# Altium PCB LED.PcbDoc
Units mm, origin at the board's own origin, x right, y up, seen from the top; angles counter-clockwise.
Board outline 20 x 20 mm, 2 copper layers (Top Layer, Bottom Layer), stack 1.671 mm thick; 5 components, 4 nets, 10 pads, 1 vias.
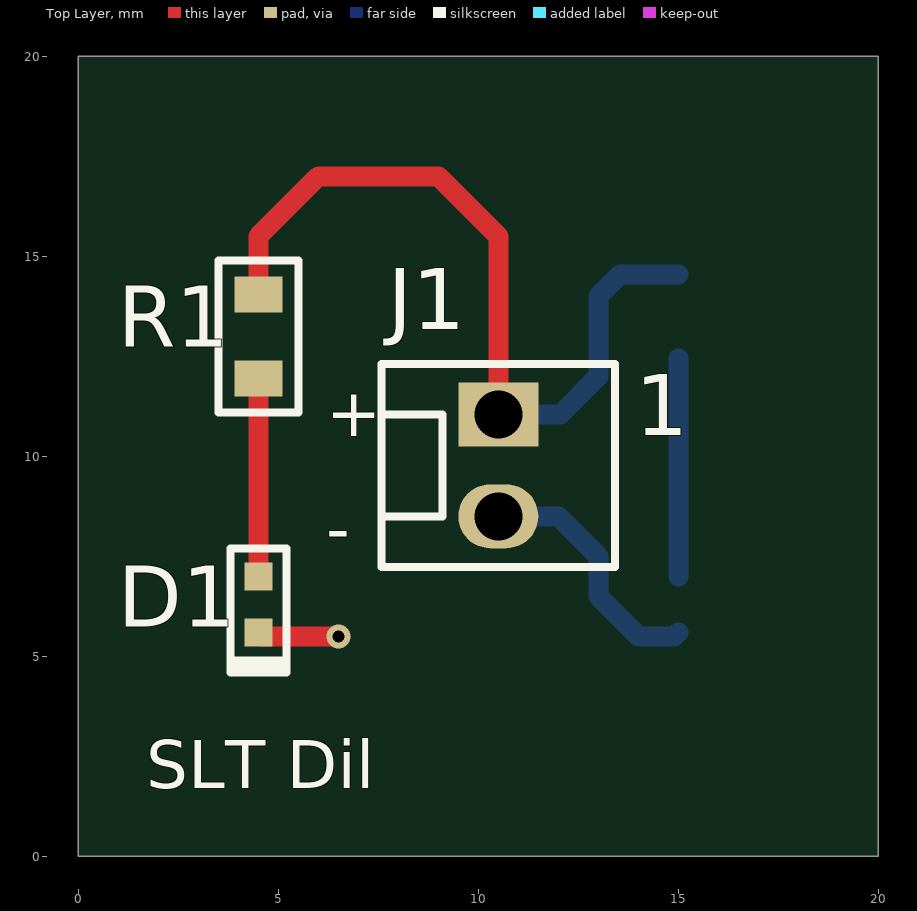
[diagram p0: Top Layer view]
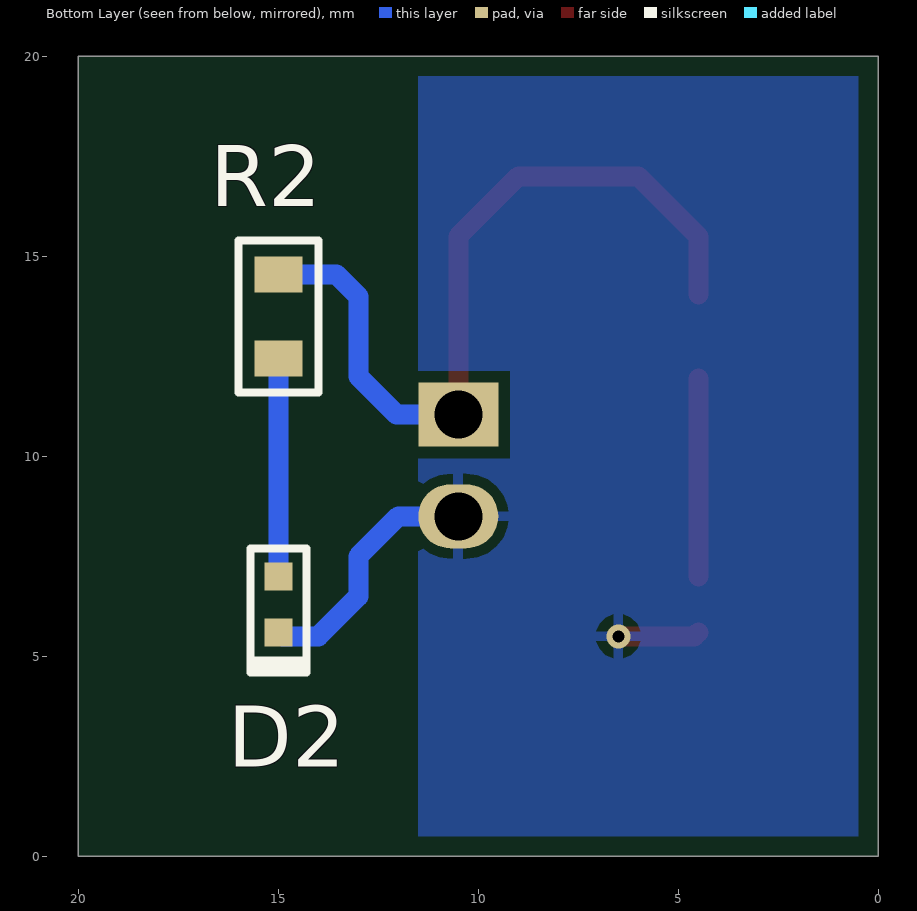
[diagram p1: Bottom Layer view, seen from below]
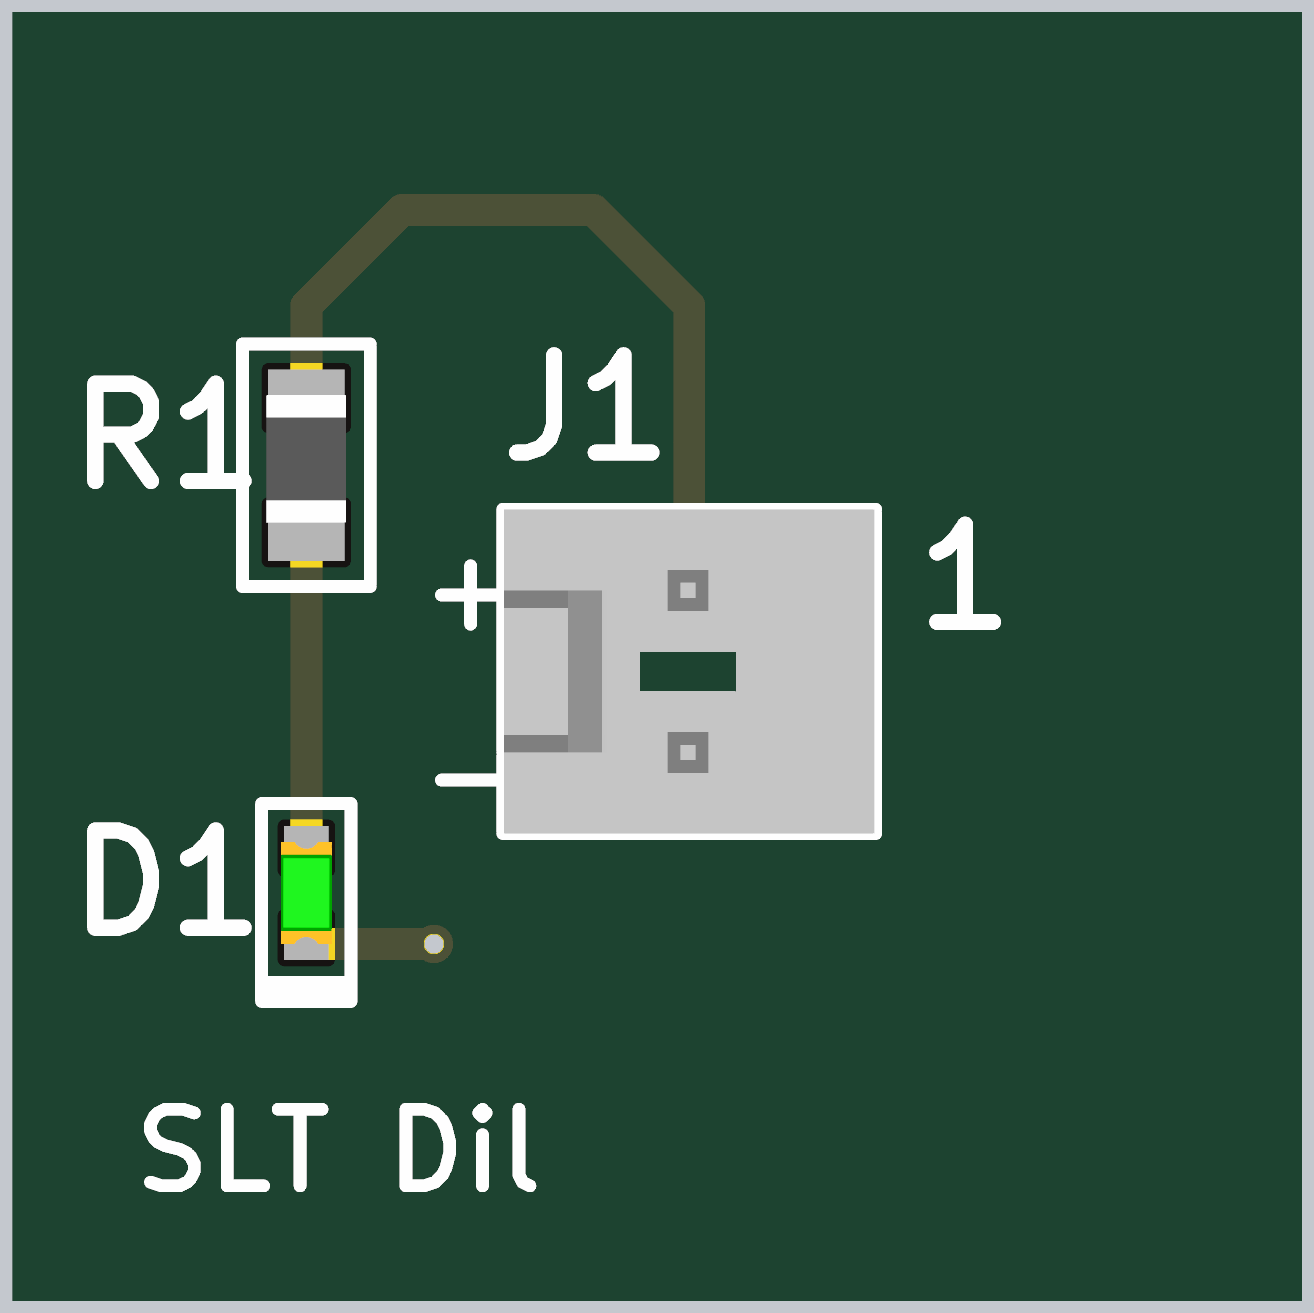
[diagram p2: 3D render of the assembled board from above, using the file's embedded part models]

## Layer stack, top to bottom
Top Solder: solder mask 0.0102, Solder Resist, Dk 3.5
Top Layer: signal copper 0.0356
Dielectric 1: dielectric 1.6, FR-4, Dk 4.8
Bottom Layer: signal copper 0.0356
Bottom Solder: solder mask 0.0102, Solder Resist, Dk 3.5

## Board outline
0,0 20,0 20,20 0,20

## Design rules (kind name [scope] priority, off if disabled: settings)
Clearance [All] p1: gap=0.3 ignorepadtopadclearanceinfootprint=FALSE
PolygonConnect [All] p1: connectstyle=Relief reliefconductorwidth=0.254 reliefentries=4 polygonreliefangle="90 Angle" airgapwidth=0.254
RoutingVias [All] p1: holewidth=0.3 width=0.6 viastyle="Through Hole" minholewidth=0.3 minwidth=0.6 maxholewidth=0.3 maxwidth=0.6
SilkToSolderMaskClearance [IsPad] p1: minsilkscreentomaskgap=0.1 clearancetoexposedcopper=TRUE
SolderMaskExpansion [All] p1: expansion=0.102 istentingtop=FALSE
Width [All] p1: maxlimit=1 minlimit=0.3 preferedwidth=0.5
29 further rules are at their usual default settings.

## Components (designator, comment, footprint, x,y, rotation, side; value= is the part's Value field where it differs from the comment)
D1 "GREEN" LED0603G 4.5,6.3 r90 top
D2 "GREEN" LED0603G 15,6.3 r90 bottom
J1 "1x2 Header" HDR1x2 10.5,11.04 r0 top
R1 "360R" R0805 4.5,13 r270 top
R2 "360R" R0805 15,13.5 r270 bottom

## Footprints (in the part's own frame and the unit in brackets; to place one, negate y for a bottom-side part, rotate by r counter-clockwise, add the part's x,y. Pads: shape width x height; smd on the part's side, far side on the other; paste and mask are expansions set on the pad)
HDR1x2 [mm]
  rect 2x1.6 hole 1.2: 1(0,0)
  oval 2x1.6 hole 1.2: 2(0,-2.54)
  silkscreen extent -2.92,-3.81 2.92,1.27, body extent -2.9,-3.81 2.9,1.27, height 11.71
LED0603G [mm]
  rect 0.7x0.7 smd: 1(-0.7,0) 2(0.7,0)
  silkscreen extent -1.7,-0.7 1.4,0.7, body extent -0.8,-0.4 0.8,0.4, height 0.59
R0805 [mm]
  rect 0.9x1.2 smd: 1(-1.05,0) 2(1.05,0)
  silkscreen extent -1.9,-1 1.9,1, body extent -1.1,-0.63 0.9,0.63, height 0.61

## Part data
D1 D2: library part LSM0603453V, "LED SM 0603 3V -/1000/-MCD GREEN", Case Code (Imperial)=0603, Case Code (Metric)=1608, Color=Green, Forward Voltage=2V, Lens Color=Colorless, Manufacturer="Visual Communications", Supplier Part Number=LSM0603453VCT-ND, Test Current=20mA, Case/Package=0603, Category=LEDs, ComponentLink1Description=http://www.farnell.com/datasheets/2699708.pdf?src-supplier=Farnell, ComponentLink1URL=http://www.farnell.com/datasheets/2699708.pdf?src-supplier=Farnell, ComponentLink2Description=http://www.farnell.com/datasheets/2699708.pdf?src-supplier=Newark, ComponentLink2URL=http://www.farnell.com/datasheets/2699708.pdf?src-supplier=Newark, ComponentLink3Description=https://vcclite.com/wp-content/uploads/wpallimport/files/files/LSM0603453V.pdf?src-supplier=Digi-Key, ComponentLink3URL=https://vcclite.com/wp-content/uploads/wpallimport/files/files/LSM0603453V.pdf?src-supplier=Digi-Key, Dominant Wavelength=572nm, Height=0.65mm, Length=1.6mm, Lens Size=0.8mm, Lens Style=Flat, Lens Transparency=Clear, Luminous Intensity=63mcd, Manufacturer Part Number=LSM0603453V, Mounting Technology="Surface Mount", Packaging="Cut Tape", Pricing="1=0.4, 10=0.247, 100=0.1421, 1000=0.11124, 2000=0.10197 (USD)", RoHS=Yes, RoHS Compliant=Yes, Series=LSM0603, Stock=90741, Supplier=Digi-Key, Viewing Angle=120°, Width=0.8mm
J1: library part 22-27-2021, "CONN HEADER VERT 2POS 2.54MM", Current Rating=4A, Flammability Rating="UL94 V-0", Housing Color=Natural, Manufacturer=Molex, Package Quantity=24000, Supplier Part Number=WM4111-ND, Voltage Rating=500V, Voltage Rating (DC)=250V, Category="Headers and Wire Housings", Contact Gender=Male, Contact Material=Tin, Contact Plating=Tin, Contact Type=-, Gender=Male, Housing Material=Nylon, Lead Free="Lead Free", Manufacturer Part Number=22-27-2021, Material=Nylon, Number of Positions=2, Number of Rows=1, Packaging=Bulk, Pitch=2.54mm, Pricing="1=0.3, 10=0.245, 100=0.18, 1000=0.14317, 5000=0.12272, 10000=0.11453 (USD)", RoHS=Yes, RoHS Compliant=Yes, Series=6410, Stock=162137, Supplier=Digi-Key, Termination="Through Hole", Weight=0.00769oz
R1 R2: library part AC0805FR-07360RL, "RES SMD 360 OHM 1% 1/8W 0805", Case/Package=0805, Manufacturer=Yageo, Max Operating Temperature=155°C, Max Power Dissipation=125mW, Min Operating Temperature=-55°C, Supplier Part Number=13-AC0805FR-07360RLCT-ND, Temperature Coefficient=100ppm/°C, Tolerance=1%, Category="Chip SMD Resistors", ComponentLink1Description=http://www.yageo.com/NewPortal/yageodocoutput?fileName=/pdf/R-Chip/PYu-AC_51_RoHS_L_6.pdf&src-supplier=Digi-Key, ComponentLink1URL=http://www.yageo.com/NewPortal/yageodocoutput?fileName=/pdf/R-Chip/PYu-AC_51_RoHS_L_6.pdf&src-supplier=Digi-Key, Features="Moisture Resistant,Automotive AEC-Q200", Height=0.024inch, Length=0.079inch, Manufacturer Part Number=AC0805FR-07360RL, Number of Terminations=2, Packaging="Tape and Reel", Pricing="1=0.1, 10=0.031, 100=0.0166, 1000=0.00997, 2500=0.00833 (USD)", RoHS=Yes, RoHS Compliant=Yes, Series=AC, Stock=12460, Supplier=Digi-Key, Width=0.049inch

## Via types
v1: diameter 0.6, hole 0.3, Top Layer to Bottom Layer, tented both sides, 1 vias

## Nets (pads, with @x,y where several pads share a name; then routed paths per layer and width w, separated by ;. In a path a pad name is that pad's centre, name@x,y a point inside that pad or via, vN(x,y) a via of type N, cw(c..) or ccw(c..) an arc to the next point about the centre after c; other vN are vias at no path point)
+3V3: J1.1 R1.1 R2.1 | length 20.3
  Top Layer w0.5: R1.1 4.5,15.5 6,17 9,17 10.5,15.5 J1.1
  Bottom Layer w0.5: J1.1 12.04,11.04 13,12 13,14 13.55,14.55 R2.1
DIODE1: D1.2 R1.2 | length 4.9
  Top Layer w0.5: D1.2 R1.2
DIODE2: D2.2 R2.2 | length 5.4
  Bottom Layer w0.5: D2.2 R2.2
GND: D1.1 D2.1 J1.2 | length 8.4
  Top Layer w0.5: D1.1 4.6,5.5 v1(6.5,5.5)
  Bottom Layer w0.5: J1.2 12,8.5 13,7.5 13,6.5 14,5.5 14.9,5.5 D2.1

## Polygon pours and split planes (outlines as drawn)
GND on Bottom Layer "GND_L02_P000" (solid, pour order 0): 0.5,0.5 11.5,0.5 11.5,19.5 0.5,19.5

## Silkscreen, mask and mechanical layers (free items; w line width, h text height)
Top Overlay:
  text "+" at 6.2,10.5 h1.2
  text "-" at 6.2,7.6 h1.2
  text "SLT Dil" at 1.7,1.7 h1.2
Board:
  the board outline again, w0.2

## Text inside footprints (layer, text, board x,y; h text height)
J1: Top Overlay "1" at 13.929,10.532 h1.52